# Altium PCB SIGNAL-GENERATOR-NODE-PCB.PcbDoc
Units mm, origin at the board's own origin, x right, y up, seen from the top; angles counter-clockwise.
Board outline 152.4 x 101.6 mm, 2 copper layers (Top Layer, Bottom Layer); 64 components, 36 nets, 222 pads, 21 vias.
Unrouted connection lines stored in the file: 105.
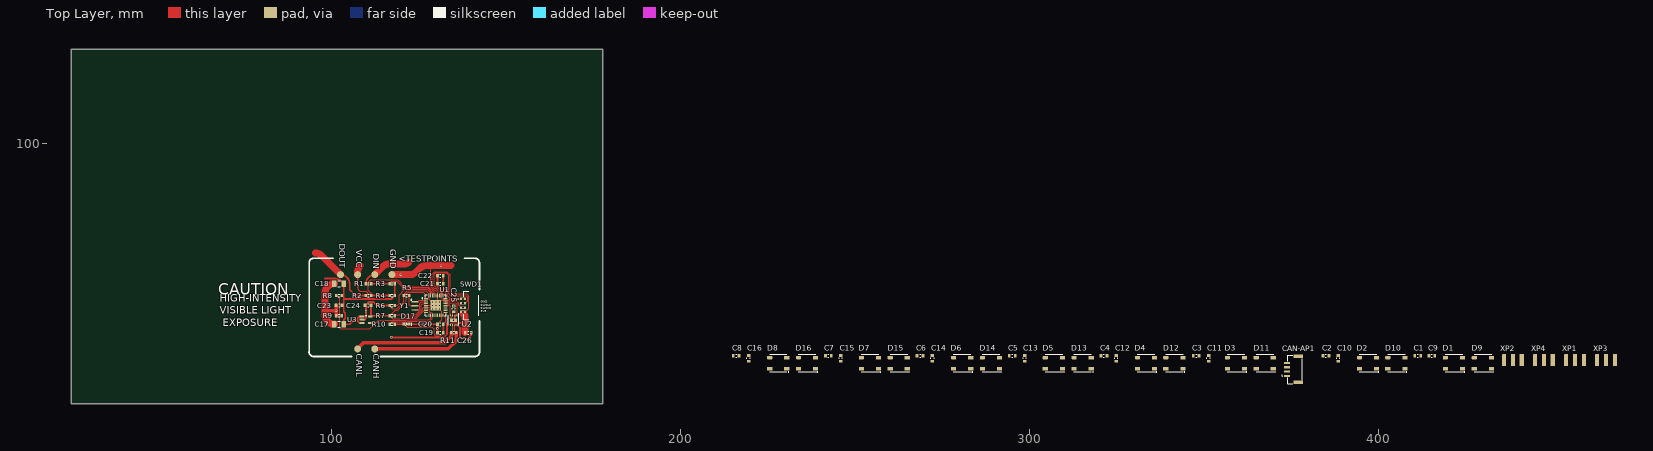
[diagram p0: Top Layer view]
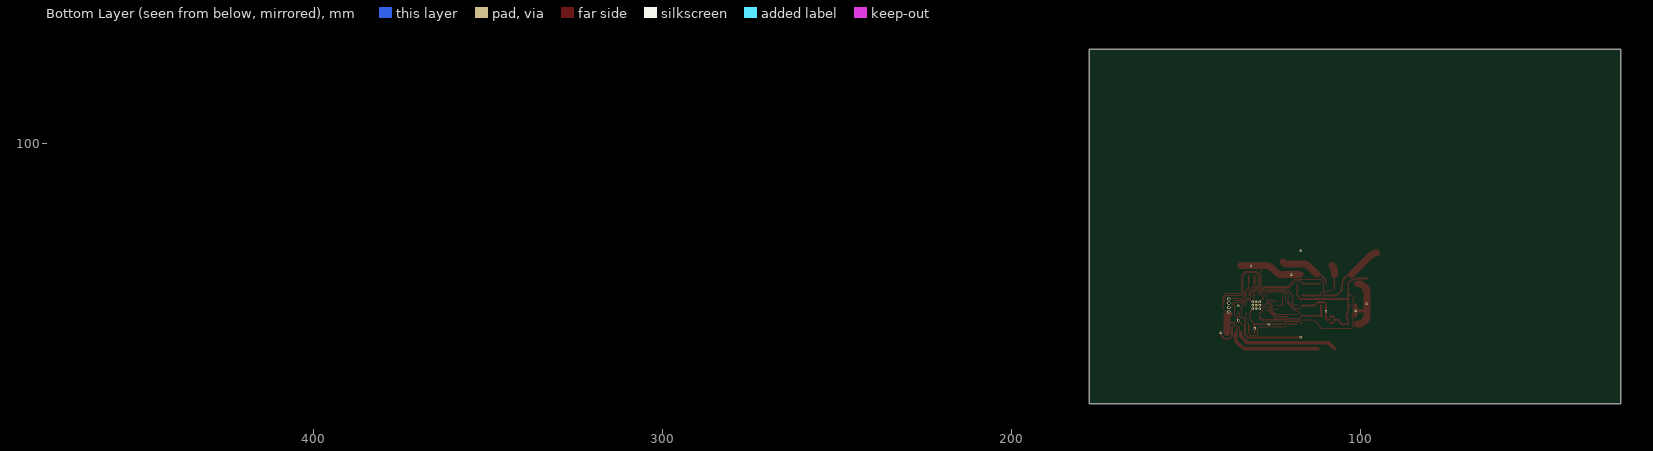
[diagram p1: Bottom Layer view, seen from below]

## Layer stack, top to bottom
Top Solder: solder mask 0.0102, Solder Resist, Dk 3.5
Top Layer: signal copper 0.0356
Dielectric 1: dielectric 0.32, FR-4, Dk 4.8
Bottom Layer: signal copper 0.0356
Bottom Solder: solder mask 0.0102, Solder Resist, Dk 3.5

## Board outline
25.4,25.4 177.8,25.4 177.8,127 25.4,127

## Design rules (kind name [scope] priority, off if disabled: settings)
Clearance [All] p1: gap=0.17 ignorepadtopadclearanceinfootprint=FALSE
PolygonConnect [All] p1: connectstyle=Relief reliefconductorwidth=0.254 reliefentries=4 polygonreliefangle="90 Angle" airgapwidth=0.254
RoutingVias [All] p1: holewidth=0.3 width=0.7 viastyle="Through Hole" minholewidth=0.3 minwidth=0.7 maxholewidth=0.5 maxwidth=1
SolderMaskExpansion [All] p1: expansion=0.102 istentingtop=FALSE
Width [All] p1: maxlimit=5 minlimit=0.17 preferedwidth=0.2
30 further rules are at their usual default settings.

## Components (designator, comment, footprint, x,y, rotation, side; value= is the part's Value field where it differs from the comment)
C1 "GX035C104MAT2-500" *CAPC1608X90 411.353,39.116 r0 top value=0.1u
C2 "GX035C104MAT2-500" *CAPC1608X90 385.064,39.116 r0 top value=0.1u
C3 "GX035C104MAT2-500" *CAPC1608X90 347.853,39.116 r0 top value=0.1u
C4 "GX035C104MAT2-500" *CAPC1608X90 321.437,39.116 r0 top value=0.1u
C5 "GX035C104MAT2-500" *CAPC1608X90 295.148,39.116 r0 top value=0.1u
C6 "GX035C104MAT2-500" *CAPC1608X90 268.732,39.116 r0 top value=0.1u
C7 "GX035C104MAT2-500" *CAPC1608X90 242.443,39.116 r0 top value=0.1u
C8 "GX035C104MAT2-500" *CAPC1608X90 216.027,39.116 r0 top value=0.1u
C9 "GX035C104MAT2-500" *CAPC1608X90 415.417,39.116 r0 top value=0.1u
C10 "GX035C104MAT2-500" *CAPC1608X90 388.62,38.354 r90 top value=0.1u
C11 "GX035C104MAT2-500" *CAPC1608X90 351.409,38.354 r90 top value=0.1u
C12 "GX035C104MAT2-500" *CAPC1608X90 324.993,38.354 r90 top value=0.1u
C13 "GX035C104MAT2-500" *CAPC1608X90 298.704,38.354 r90 top value=0.1u
C14 "GX035C104MAT2-500" *CAPC1608X90 272.288,38.354 r90 top value=0.1u
C15 "GX035C104MAT2-500" *CAPC1608X90 245.999,38.354 r90 top value=0.1u
C16 "GX035C104MAT2-500" *CAPC1608X90 219.583,38.354 r90 top value=0.1u
C17 "GRM31CR61A476KE15L" *CAPC3216X125N 102.218,48.128 r0 top value=47u
C18 "GRM31CR61A476KE15L" *CAPC3216X125N 102.218,59.728 r0 top value=47u
C19 "GX035C104MAT2-500" *CAPC1608X90 131.249,45.728 r180 top value=0.1u
C20 "GX035C104MAT2-500" *CAPC1608X90 131.249,48.128 r180 top value=0.1u
C21 "GX035C104MAT2-500" *CAPC1608X90 131.249,59.728 r0 top value=0.1u
C22 "GX035C104MAT2-500" *CAPC1608X90 131.249,62.028 r0 top value=0.1u
C23 "GX035C104MAT2-500" *CAPC1608X90 102.218,53.518 r180 top value=0.1u
C24 "GX035C104MAT2-500" *CAPC1608X90 110.528,53.518 r180 top value=0.1u
C25 "GX035C104MAT2-500" *CAPC1608X90 135.086,52.538 r90 top value=0.1u
C26 "GX035C104MAT2-500" *CAPC1608X90 139.231,45.728 r0 top value=0.1u
CAN-AP1 "SM04B-GHS-TB(LF)(SN)-" JST_SM04B-GHS-TB(LF)(SN)- 376.174,35.179 r90 top
D1 "WS2812" LED_WS2812 421.767,36.957 r0 top
D2 "WS2812" LED_WS2812 397.129,36.957 r0 top
D3 "WS2812" LED_WS2812 359.283,36.957 r0 top
D4 "WS2812" LED_WS2812 333.502,36.957 r0 top
D5 "WS2812" LED_WS2812 307.086,36.957 r0 top
D6 "WS2812" LED_WS2812 280.797,36.957 r0 top
D7 "WS2812" LED_WS2812 254.381,36.957 r0 top
D8 "WS2812" LED_WS2812 228.092,36.957 r0 top
D9 "WS2812" LED_WS2812 430.022,36.957 r0 top
D10 "WS2812" LED_WS2812 405.257,36.957 r0 top
D11 "WS2812" LED_WS2812 367.538,36.957 r0 top
D12 "WS2812" LED_WS2812 341.63,36.957 r0 top
D13 "WS2812" LED_WS2812 315.341,36.957 r0 top
D14 "WS2812" LED_WS2812 289.052,36.957 r0 top
D15 "WS2812" LED_WS2812 262.636,36.957 r0 top
D16 "WS2812" LED_WS2812 236.347,36.957 r0 top
D17 "0603-LED-BLUE" *LEDM1608X80_LTE-C1906R-14(Primary) 121.549,48.152 r180 top
R1 "Res3" J1-0603 110.678,59.728 r180 top value=330
R2 "Res3" J1-0603 110.678,56.368 r180 top value=330
R3 "Res3" J1-0603 117.449,59.728 r0 top value=10K
R4 "Res3" J1-0603 117.449,56.368 r0 top value=10K
R5 "RC0603FR-0710KL" J1-0603 121.549,56.368 r0 top value=0R
R6 "RC0603FR-0710KL" J1-0603 117.449,53.518 r0 top value=10k
R7 "RC0603FR-0710KL" J1-0603 117.449,50.568 r0 top value=10k
R8 "RC0603FR-0710KL" J1-0603 102.218,56.368 r0 top value=10k
R9 "RC0603FR-0710KL" J1-0603 102.218,50.568 r0 top value=10k
R10 "Res3" J1-0603 117.449,48.128 r0 top value=330
R11 "Res3" J1-0603 135.086,45.728 r0 top value=120
SWD1 "BM04B-GHS-TBT(LF)(SN)(N)" JST_BM04B-GHS-holes 141.149,53.518 r90 top
U1 "STM32F103T8" *QFN50P600X600X100-37N 129.949,53.518 r0 top
U2 "TJA1042" SOT782-1 135.069,49.262 r180 top
U3 "SPX3819M5-L-3-3/TR" *SOT95P280X145-5N 109.949,49.428 r0 top value=3V3
XP1 "Header 3" "HDR Side 3 pin" 456.438,37.846 r0 top
XP2 "Header 3" "HDR Side 3 pin" 438.658,37.846 r0 top
XP3 "Header 3" "HDR Side 3 pin" 465.328,37.846 r0 top
XP4 "Header 3" "HDR Side 3 pin" 447.548,37.846 r0 top
Y1 "CSTCE8M00G55-R0" *OSC_CSTCE8M00G55-R0 123.949,53.405 r270 top

## Footprints (in the part's own frame and the unit in brackets; to place one, negate y for a bottom-side part, rotate by r counter-clockwise, add the part's x,y. Pads: shape width x height; smd on the part's side, far side on the other; paste and mask are expansions set on the pad)
*CAPC1608X90 [mm]
  rect 0.8x1 smd: 1(-0.85,0) 2(0.85,0)
  silkscreen extent -0.15,-0.45 0.15,0.45, body extent -0.8,-0.4 0.8,0.41, height 0.88
*CAPC3216X125N [mm]
  rect 1.38x1.82 smd: 1(-1.369,0) 2(1.369,0)
  silkscreen extent -0.36,-0.9 0.36,0.9, body extent -1.6,-0.87 1.6,0.87, height 1.71
*LEDM1608X80_LTE-C1906R-14(Primary) [mm]
  rect 0.8x0.8 smd: A(0.75,0) C(-0.75,0)
  silkscreen extent -1.45,-0.38 0.16,0.45, body extent -0.8,-0.3 0.8,0.3, height 1.15
*OSC_CSTCE8M00G55-R0 [mm]
  rect 0.4x2 smd: 1(-1.2,0) 2(0,0) 3(1.2,0)
  silkscreen extent -1.83,-1.13 -1.57,-0.87, body extent -1.6,-0.65 1.6,0.65, height 1
*QFN50P600X600X100-37N [mm]
  rect 1.08x0.26 smd: 1(-2.815,2) 2(-2.815,1.5) 3(-2.815,1) 4(-2.815,0.5) 5(-2.815,0) 6(-2.815,-0.5) 7(-2.815,-1) 8(-2.815,-1.5) 9(-2.815,-2) 19(2.815,-2) 20(2.815,-1.5) 21(2.815,-1) 22(2.815,-0.5) 23(2.815,0) 24(2.815,0.5) 25(2.815,1) 26(2.815,1.5) 27(2.815,2)
  rect 0.26x1.08 smd: 10(-2,-2.815) 11(-1.5,-2.815) 12(-1,-2.815) 13(-0.5,-2.815) 14(0,-2.815) 15(0.5,-2.815) 16(1,-2.815) 17(1.5,-2.815) 18(2,-2.815) 28(2,2.815) 29(1.5,2.815) 30(1,2.815) 31(0.5,2.815) 32(0,2.815) 33(-0.5,2.815) 34(-1,2.815) 35(-1.5,2.815) 36(-2,2.815)
  rect 3x3 smd: ""(0,0)
  silkscreen extent -3.97,-3 3,3, body extent -3,-3 3,3, height 1
*SOT95P280X145-5N [mil]
  rect 52x22 smd: 1(-46,37) 2(-46,0) 3(-46,-37) 4(46,-37) 5(46,37)
  silkscreen extent -7,46 7,48, body extent -55,-57 55,57, height 57
"HDR Side 3 pin" [mm]
  rrect50% 1.2x3.5 smd: 1(-2.54,0)
  rect 1.2x3.5 smd: 2(0,0) 3(2.54,0)
  body extent -3.85,-10.67 3.77,1.27, height 1.57
J1-0603 [mm] "Chip Resistor, Body 1.6x0.8mm, IPC High Density"
  rect 0.7x0.9 smd: 1(-0.75,0) 2(0.75,0)
  silkscreen extent -0.2,-0.35 0.2,0.35, body extent -0.85,-0.48 0.85,0.48, height 0.9
JST_BM04B-GHS-holes [mm]
  rect 0.7x1.7 / inner rect 0.6x1.7 / far side round 0.9 hole 0.6: 1(1.875,3.35) 2(0.625,3.35) 3(-0.625,3.35) 4(-1.875,3.35)
  silkscreen extent -4.13,-1.1 4.13,4.9, body extent -4.12,-1.02 4.12,3.93, height 4.15
JST_SM04B-GHS-TB(LF)(SN)- [mm]
  rect 0.6x1.7 smd: 1(-1.875,2.275) 2(-0.625,2.275) 3(0.625,2.275) 4(1.875,2.275)
  rect 1x2.7 smd: SH1(-3.725,-0.925) SH2(3.725,-0.925)
  silkscreen extent -4.13,-2.02 4.13,3.77, body extent -4.06,-2.16 4.19,2.69, height 4.35
LED_WS2812 [mm]
  rrect50% 1.5x1 smd: 1(-2.45,1.6)
  rect 1.5x1 smd: 2(-2.45,-1.6) 3(2.45,-1.6) 4(2.45,1.6)
  silkscreen extent -2.5,-2.64 3.02,2.5, body extent -2.7,-2.45 2.65,2.5, height 1.5
SOT782-1 [mm]
  rect 0.3x0.525 smd: 1(-0.975,-1.362) 2(-0.325,-1.362) 3(0.325,-1.362) 4(0.975,-1.362) 5(0.975,1.362) 6(0.325,1.362) 7(-0.325,1.362) 8(-0.975,1.362)
  rect 2x0.9 smd paste-2: P$9(0,0)
  silkscreen extent -1.5,-1.88 1.5,1.5, body extent -1.52,-1.52 1.52,1.52, height 0.85

## Part data
C1 C2 C3 C4 C5 C6 C7 C8 C9 C10 C11 C12 C13 C14 C15 C16 C19 C20 C21 C22 C23 C24 C25 C26: "Cap Thin Film 0.1uf 50v 0603", Package="0603 AVX", MF=AVX, Pacage Metric=1608, SnapEDA_Link=https://www.snapeda.com/parts/GX035C104MAT2-500/AVX/view-part/?ref=snap, Type=SMD
  C1 C2 C3 C4 C5 C6 C7 C8 C9 C10 C11 C12 C13 C14 C15 C16 C19 C20 C21 C22 C25 C26: MP="GX035C104MAT2-500 or CL10B104JB8NNNC"
  C23 C24: MP=GX035C104MAT2-500
C17 C18: "Multilayer Ceramic Capacitor, GRM Series, 47 - F, - 10%, X5R, 10 V, 1206 [3216 Metric]", Package="1206 Murata Electronics", MF="Murata Electronics", MP=GRM31CR61A476KE15L, SnapEDA_Link=https://www.snapeda.com/parts/GRM31CR61A476KE15L/Murata%20Electronics%20North%20America/view-part/?ref=snap, Type=SMD
CAN-AP1: "Connector Header Surface Mount, Right Angle 4 position 0.049 _1.25mm_", Package=None, ChipDip_Link=https://www.chipdip.ru/product/sm04b-ghs-tb-lf-sn-gh-1.25mm-header-side-ent, HelpURL=http://www.farnell.com/datasheets/2082975.pdf, MF="JST Sales", MP=SM04B-GHS-TB(LF)(SN), SnapEDA_Link=https://www.snapeda.com/parts/SM04B-GHS-TB%28LF%29%28SN%29-/JST%20Sales%20America%20Inc./view-part/2759740/?ref=snap, System=Connector
D1 D2 D3 D4 D5 D6 D7 D8 D9 D10 D11 D12 D13 D14 D15 D16: "Addressable Lighting - 5 LED Discrete Serial _Shift Register_ Red, Green, Blue _RGB_ 5.00mm Dia", Package="SparkFun Electronics", Availability=Unavailable, ChipDip_Link=https://www.chipdip.ru/product/ws2812b, HelpURL=https://static.chipdip.ru/lib/554/DOC001554925.pdf, MF="SparkFun Electronics", MP=WS2812, Price=None, SnapEDA_Link=https://www.snapeda.com/parts/WS2812/SparkFun%20Electronics/view-part/106391/?ref=snap
D17: library part LTE-C1906R-14, "LED IrLED Chip LED 2-Pin SMD T/R", Package="0603 Lite-On", MP=0603-LED-BLUE, SnapEDA_Link=https://www.snapeda.com/parts/LTE-C1906R-14/Lite-On%20Inc./view-part/?ref=snap, Type=SMD
R1 R2 R3 R4 R10: "Resistor", Package=R0603, Pacage Metric=1608, Type=SMD
  R1 R2 R3 R4: ChipDip_Link=https://www.chipdip.ru/product0/9000079736, HelpURL=https://www.chipdip.ru/product0/9000079736, MP="4.7K 1% 0603"
  R10: ChipDip_Link=https://www.chipdip.ru/product0/9000079628, HelpURL=https://www.chipdip.ru/product0/9000079628, MP=RC0603FR-07330RL
R5 R6 R7 R8 R9: "10 kOhms 1 0.1 W 1 10 W Chip Resistor 0603 1608 Metric Thick Film", Package=R0603, ChipDip_Link=https://www.chipdip.ru/product0/9000079736, HelpURL=https://www.chipdip.ru/product0/9000079736, MF="Yageo or NXP", MP="10K 1% 0603", Pacage Metric=1608, SnapEDA_Link=https://www.snapeda.com/parts/RC0603FR-0710KL/Yageo/view-part/?ref=dk&t=RC0603FR-0710KL&con_ref=None, Type=SMD
R11: "120 Ohms 1 0.1 W 1 10 W Chip Resistor 0603 1608 Metric Thick Film", Package=R0603, ChipDip_Link=https://www.chipdip.ru/product0/9000079618, HelpURL=https://www.chipdip.ru/product0/9000079618, MP=RC0603FR-07120RL, Pacage Metric=1608, Type=SMD
SWD1: "Conn Shrouded Header HDR 4 POS 1.25mm Solder ST SMD Reel", Package=None, Instructions="Do not install", MF="JST Sales", MP=SM04B-GHS-TB(LF)(SN), SnapEDA_Link=https://www.snapeda.com/parts/BM04B-GHS-TBT%28LF%29%28SN%29%28N%29/JST%20Sales%20America%20Inc./view-part/?ref=snap, System=Connector, Type=SMD
U1: "STM32F103T8U6, Микроконтроллер 32BIT ARM 64K FLASH [VFQFPN-36]", Package=VFQFPN-36, ChipDip_Link=https://www.chipdip.ru/product/stm32f103t8u6-2, HelpURL=http://www.st.com/stonline/products/literature/ds/13587.pdf, MF=STM, MP=STM32F103T8U6, SnapEDA_Link=https://www.snapeda.com/parts/STM32F103T8U6TR/STMicroelectronics/view-part/?ref=search&t=STM32F103T8U6, Type=SMD
U2: "1/1 Transceiver Half CANbus 8-SO", Package="VDFN-8 NXP USA", ChipDip_Link=https://www.chipdip.ru/product1/8002840332, HelpURL=https://static.chipdip.ru/lib/583/DOC001583059.pdf, MF="NXP USA", MP=TJA1042, SnapEDA_Link=https://www.snapeda.com/parts/TJA1042/NXP%20USA%20Inc./view-part/900919/?ref=snap, Type=SMD
U3: library part SPX3819M5-L, "Low Dropout Voltage Regulator, Adjustable 0.5A, В±1%, 2.5 to 16 Vin, 5-Pin SOT-23", Package="SOT-23-5 Exar", ChipDip_Link=https://www.chipdip.ru/product1/8003455237, HelpURL=http://www.farnell.com/datasheets/2614478.pdf, MF="MaxLinear, Inc.", MP=SPX3819M5-L-3-3/TR, SnapEDA_Link=https://www.snapeda.com/parts/SPX3819M5-L/MaxLinear%2C%20Inc./view-part/?ref=snap, Type=SMD
XP1 XP2 XP3 XP4: "Header, 3-Pin", LatestRevisionDate=17-Jul-2002, LatestRevisionNote="Re-released for DXP Platform.", Publisher="Altium Limited"
Y1: "Ceramic Resonator 8MHz ??0.5% _Tol_ ??0.2% _Stability_ 33pF 40Ohm 3-Pin CSMD T/R", Package="SMD-3 Murata", ChipDip_Link=https://www.chipdip.ru/product1/8001783721, HelpURL=https://www.murata.com/en-eu/api/pdfdownloadapi?cate=&partno=CSTCE8M00G55-R0, MF=Murata, MP=CSTCE8M00G55-R0, SnapEDA_Link=https://www.snapeda.com/parts/CSTCE8M00G55-R0/Murata%20Electronics%20North%20America/view-part/?ref=snap, Type=SMD

## Free pads (board coordinates)
  round 2 smd: 5(112.449,62.328) 6(102.647,62.328) 8(107.548,62.328) 9(117.359,62.328) 10(112.449,41.048) 11(107.548,41.048)

## Via types
v1: diameter 0.7, hole 0.3, Top Layer to Bottom Layer, tented top, 21 vias

## Nets (pads, with @x,y where several pads share a name; then routed paths per layer and width w, separated by ;. In a path a pad name is that pad's centre, name@x,y a point inside that pad or via, vN(x,y) a via of type N, cw(c..) or ccw(c..) an arc to the next point about the centre after c; other vN are vias at no path point)
3.3: C19.1 C20.1 C21.1 C22.1 C24.1 C26.1 R7.1 SWD1.4 U1.1 U1.6 U1.12 U1.19 U1.27 U1.29 U2.5 U3.5 | length 119.2
  Top Layer w0.2: U1.1 127.134,56.543 126.349,57.328 121.982,57.328 121.544,56.89 121.544,54.644 119.028,52.128 118.259,52.128 R7.1 117.572,49.695 120.716,49.695 121.349,50.328 124.266,50.328 126.149,52.211 126.149,52.692 126.475,53.018 U1.6 127.867,53.018 128.064,52.821 128.064,51.813 128.249,51.628 128.697,51.628 128.953,51.372 U1.12@128.953,51.154 ; U1.12 128.949,49.628 128.249,48.928 121.849,48.928 121.499,48.578 121.499,47.578 121.749,47.328 128.949,47.328 129.461,46.816 129.461,45.206 129.819,44.848 131.315,44.848 132.099,45.631 C19.1 ; C21.1 130.399,59.478 132.764,57.113 U1.27 132.754,55.528 132.719,55.493 131.608,55.493 131.449,55.652 U1.29 131.449,56.962 130.049,58.362 130.016,58.395 129.548,58.395 128.967,58.975 128.967,62.512 129.683,63.228 133.149,63.228 134.049,62.328 134.049,57.328 134.549,56.828 138.749,56.828 139.449,56.128 139.449,52.628 138.464,51.643 SWD1.4 SWD1.4@137.674,51.518 ; C20.1 132.764,48.793 U1.19 ; U2.5 134.094,48.144 134.462,48.512 136.569,48.512
  Top Layer w0.5: U3.5 U3.5@111.318,50.568 ; C24.1 111.378,50.628 U3.5@111.318,50.568 ; R7.1 U3.5@111.318,50.568 ; C21.1 C22.1 ; C19.1 C20.1 ; 136.569,48.512 136.575,48.507 138.381,48.507
  Top Layer w2: 137.799,51.118 138.381,50.536 138.381,48.507 C26.1
ADC_5V: R8.1 R9.2 U1.8 | length 37.4
  Top Layer w0.2: R8.1 102.19,55.646 ; 102.191,55.645 cw(c102.048,55.505) 102.248,55.506 102.249,50.958 102.249,50.741 cw(c101.468,50.568) 102.249,50.395 102.249,50.147 102.25,47.311 ccw(c102.45,47.31) 102.308,47.169 102.649,46.828 111.049,46.828 113.516,49.295 121.016,49.295 121.502,49.781 124.284,49.781 126.492,51.988 127.104,51.988 U1.8 ; 102.268,50.547 cw(c102.358,50.368) 102.358,50.568 R9.2
BOOT0: R6.2 U1.35 | length 14.8
  Top Layer w0.2: R6.2 118.939,53.518 119.449,54.028 119.449,56.462 121.115,58.128 127.449,58.128 128.449,57.128 U1.35
CAN_H: CAN-AP1.2 pad.10 R11.2 U2.7 | length 29.3
  Top Layer w0.3: U2.7 135.394,46.17 R11.2
  Top Layer w1: pad.10@112.269,41.048 133.549,41.048 135.836,43.335 R11.2
CAN_L: CAN-AP1.3 pad.11 R11.1 U2.6 | length 31.7
  Top Layer w0.3: R11.1 134.744,46.136 U2.6
  Top Layer w1: pad.11@107.489,41.108 109.142,42.761 132.452,42.761 134.336,44.645 R11.1
CAN_RXD: U1.23 U2.4 | length 4.1
  Top Layer w0.2: U1.23 133.828,53.518 134.094,53.252 U2.4
CAN_TXD: U1.24 U2.1 | length 6.9
  Top Layer w0.2: U1.24 132.77,54.024 133.886,54.024 134.162,54.3 135.702,54.3 136.044,53.959 U2.1
DIN: D1.4 pad.5 R1.2 XP1.1 XP2.1 XP3.3 XP4.3 | length 15.1
  Top Layer w0.5: R1.2 cw(c112.617,59.728) 110.716,61.63 cw(c112.401,59.944) 112.401,62.328 pad.5
  Top Layer w2: pad.5 114.805,64.684 cw(c116.601,62.888) 116.601,65.428 121.042,65.428 ccw(c121.042,67.135) 122.249,65.928
DOUT: D16.2 pad.6 R2.2 | length 20.7
  Top Layer w0.5: pad.6 cw(c102.647,59.789) 104.442,61.584 cw(c102.494,59.636) 105.249,59.636 105.249,58.311 ccw(c105.932,58.311) 105.449,57.828 106.349,56.928 ccw(c107.701,58.28) 107.701,56.368 R2.2
  Top Layer w2: 95.395,68.528 cw(c95.395,65.988) 97.191,67.784 pad.6
GND: C1.2 C2.2 C3.2 C4.2 C5.2 C6.2 C7.2 C8.2 C9.2 C10.2 C11.2 C12.2 C13.2 C14.2 C15.2 C16.2 C17.1 C18.1 C19.2 C20.2 C21.2 C22.2 C23.2 C24.2 C25.2 C26.2 CAN-AP1.4 CAN-AP1.SH1 CAN-AP1.SH2 D1.3 D2.3 D3.3 D4.3 D5.3 D6.3 D7.3 D8.3 D9.3 D10.3 D11.3 D12.3 D13.3 D14.3 D15.3 D16.3 D17.C pad.9 R5.1 R6.1 R9.1 SWD1.1 U1. U1.5 U1.17 U1.18 U1.26 U1.30 U1.31 U1.32 U1.36 U2.2 U2.8 U2.P$9 U3.2 XP1.3 XP2.3 XP3.1 XP4.1 | length 129.9
  Top Layer w0.2: R6.1 116.699,53.278 117.449,52.528 118.749,52.528 120.799,54.578 R5.1 ; R5.1@120.678,56.589 121.817,57.728 127.049,57.728 U1.36@127.977,56.8 ; U1.5 v1(129.949,53.518) ; U1.36@127.974,56.333 127.974,55.493 v1(129.949,53.518) ; 128.513,64.928 128.513,58.864 129.549,57.828 129.849,57.828 130.449,57.228 U1.31 ; U1.32 U1.31 ; C20.2 131.699,49.428 131.699,50.703 ; U1.30 U1.31 ; U1.17 131.699,50.703 ; U1.18 131.699,50.703 ; C21.2 132.099,58.731 133.249,57.581 133.249,56.241 134.094,55.396 ; 133.997,55.396 137.796,55.396 SWD1.1 ; 134.095,55.396 133.717,55.018 U1.26 131.449,55.018 v1(130.949,54.518) U1.@130.449,54.018 ; v1(135.069,49.262) U2.P$9@135.394,49.587 ; v1(129.949,53.518) U1.@130.449,54.018 ; v1(129.949,53.518) 131.699,51.768 131.699,50.703 ; U1.@130.449,54.018 U1.31
  Top Layer w0.381: C21.2 C22.2
  Top Layer w0.5: U3.2 109.564,49.428 109.949,49.813 v1(109.949,51.801) 109.949,53.789 110.681,54.521 112.056,54.521 113.059,53.518 R6.1 ; D17.C 130.375,48.152 C20.2 v1(130.399,46.928) C19.2 ; U2.P$9@135.394,49.587 U2.2 ; U2.8 136.879,47.065 136.879,44.598 137.519,43.958 139.119,43.958 140.081,44.92 v1(140.081,45.728)
  Top Layer w1: 98.229,52.008 101.335,52.008 ccw(c101.335,52.041) v1(101.368,52.041) ; C23.2 v1(101.368,52.041) ; R9.1@101.371,50.565 101.368,50.565 v1(101.368,52.041)
  Top Layer w2: C17.1 100.769,48.128 cw(c100.769,50.668) 98.229,50.668 98.229,52.008 98.229,57.188 cw(c100.769,57.188) 100.769,59.728 C18.1 ; pad.9 v1(119.928,62.328) 122.497,62.328 ccw(c122.497,64.868) 124.293,63.072 125.405,64.184 cw(c127.201,62.388) 127.201,64.928 128.513,64.928 134.369,64.928
  other v1: 126.337,48.152 128.949,52.528 129.949,52.528 130.949,52.528 135.086,53.388 128.949,53.528 130.949,53.528 98.229,53.989 128.962,54.505 129.949,54.528 131.441,64.928
LED1: R10.1 U1.11 | length 13.4
  Top Layer w0.2: R10.1 116.699,48.228 117.343,48.872 117.719,48.872 117.725,48.878 118.673,48.878 121.165,48.878 121.635,49.349 127.951,49.349 128.449,49.847 U1.11
NetD1_2: D1.2 D2.4
NetD2_2: D2.2 D3.4
NetD3_2: D3.2 D4.4
NetD4_2: D4.2 D5.4
NetD5_2: D5.2 D6.4
NetD6_2: D6.2 D7.4
NetD7_2: D7.2 D8.4
NetD8_2: D8.2 D9.4
NetD9_2: D9.2 D10.4
NetD10_2: D10.2 D11.4
NetD11_2: D11.2 D12.4
NetD12_2: D12.2 D13.4
NetD13_2: D13.2 D14.4
NetD14_2: D14.2 D15.4
NetD15_2: D15.2 D16.4
NetD17_A: D17.A R10.2 | length 2.6
  Top Layer w0.5: R10.2 120.775,48.128 D17.A
NetR5_2: R5.2 Y1.2 | length 4.4
  Top Layer w0.2: R5.2 122.299,53.778 122.649,53.428 123.926,53.428 Y1.2
NetU1_2: U1.2 Y1.1 | length 3.4
  Top Layer w0.2: Y1.1 124.826,54.605 125.249,55.028 127.124,55.028 U1.2
NetU1_3: U1.3 Y1.3 | length 5
  Top Layer w0.2: Y1.3 124.926,52.205 125.349,52.628 125.349,54.128 125.739,54.518 U1.3
NRST: R7.2 U1.4 | length 11.2
  Top Layer w0.2: R7.2 118.459,50.828 124.197,50.828 125.749,52.38 125.749,53.728 126.039,54.018 U1.4
SCL/A2: R2.1 R4.1 U1.33 | length 30.6
  Top Layer w0.2: R2.1 111.428,56.949 110.649,57.728 110.649,60.228 111.299,60.878 118.999,60.878 120.949,58.928 127.78,58.928 129.45,57.258 U1.33@129.45,56.705
  Top Layer w0.5: R2.1 R4.1
SDA/A1: R1.1 R3.1 U1.34 | length 19.7
  Top Layer w0.2: R3.1 116.699,59.807 117.37,60.478 118.728,60.478 120.678,58.528 127.615,58.528 128.957,57.186 U1.34@128.957,56.691
  Top Layer w0.5: R1.1 R3.1
SWDIO: SWD1.3 U1.25 | length 6.2
  Top Layer w0.2: U1.25 133.814,54.518 134.126,54.83 135.74,54.83 136.463,54.107 136.463,53.696 137.266,52.893 SWD1.3
SWLK: SWD1.2 U1.28 | length 25.7
  Top Layer w0.2: U1.28 131.949,57.028 130.149,58.828 129.749,58.828 129.449,59.128 129.449,62.428 129.849,62.828 132.983,62.828 133.649,62.162 133.649,56.828 134.149,56.328 138.649,56.328 139.049,55.928 139.049,54.828 138.364,54.143 SWD1.2
VCC: C1.1 C2.1 C3.1 C4.1 C5.1 C6.1 C7.1 C8.1 C9.1 C10.1 C11.1 C12.1 C13.1 C14.1 C15.1 C16.1 C17.2 C18.2 C23.1 C25.1 CAN-AP1.1 D1.1 D2.1 D3.1 D4.1 D5.1 D6.1 D7.1 D8.1 D9.1 D10.1 D11.1 D12.1 D13.1 D14.1 D15.1 D16.1 pad.8 R3.2 R4.2 R8.2 U2.3 U3.1 U3.3 XP1.2 XP2.2 XP3.2 XP4.2 | length 82.2
  Top Layer w0.2: 107.549,58.552 ccw(c108.573,58.552) 108.573,57.528 110.049,57.528 110.649,56.928 110.649,55.328 ; 133.174,48.173 133.174,49.617 133.569,50.012 134.394,50.012 134.744,50.362 U2.3
  Top Layer w0.3: U2.3 134.744,51.346 C25.1
  Top Layer w0.5: 98.171,61.214 98.181,61.224 100.875,61.224 cw(c100.875,58.015) 103.143,60.284 103.561,59.952 C18.2 103.587,56.428 ; R8.2 103.527,56.368 103.587,56.428 ; C23.1 103.477,53.518 103.587,53.628 ; pad.8 107.549,62.327 107.549,58.552 ; U3.3 107.989,48.488 107.549,48.928 107.549,49.428 ; U3.1 107.989,50.368 107.549,49.928 107.549,49.428 ; v1(117.169,44.388) 117.259,44.298 132.225,44.298 133.17,45.243 133.17,48.168 133.174,48.173 ; R3.2 R4.2 117.159,55.328 110.649,55.328 103.587,55.328 ; 103.587,53.628 103.587,55.328 ; 103.587,53.628 103.587,51.718 103.608,51.718 104.018,51.308 104.018,49.828 103.608,49.418 103.587,49.418 C17.2 105.249,48.128 106.549,49.428 107.549,49.428 ; 103.587,55.328 103.587,56.428
  Top Layer w2: pad.8 107.548,63.175 cw(c110.088,63.175) 108.292,64.971
pads on no net: U1.7 U1.9 U1.10 U1.13 U1.14 U1.15 U1.16 U1.20 U1.21 U1.22 U3.4
copper on no net:
  other v1: 117.149,69.128

## Other copper
Top Layer:
  region net 3.3: 132.164,55.493 132.164,55.495 132.307,55.638 132.304,55.642 cw(c132.1,55.768) 132.1,55.589 132.069,55.589 132.069,55.588
  region net GND: 127.974,55.913 ccw(c128.197,55.69) 127.882,55.69 127.882,55.681 ccw(c127.728,55.681) 127.837,55.789 127.823,55.803 127.904,55.884 cw(c127.974,55.814)

## Silkscreen, mask and mechanical layers (free items; w line width, h text height)
Top Overlay:
  lines w0.5: 93.619,40.168 ccw(c94.889,40.168) 94.889,38.898 105.809,38.898 ; 93.649,40.068 93.649,65.758 cw(c94.919,65.758) 94.919,67.028 100.489,67.028 ; 93.649,46.077 93.649,47.728 ; 114.119,38.898 141.199,38.898 ccw(c141.199,40.168) 142.469,40.168 142.469,41.798 142.469,49.138 ; 138.109,67.008 141.199,67.008 cw(c141.199,65.738) 142.469,65.738 142.469,57.993
  text "DOUT" at 101.647,71.204 h3 r270
  text "GND" at 116.362,69.554 h3 r270
  text "VCC" at 106.551,69.528 h3 r270
  text "DIN" at 111.454,68.316 h3 r270
  text "<TESTPOINTS" at 119.265,65.528 h3
  text "CAUTION" at 67.622,55.473 h5.5
  text "GND / SWCLK / SWDIO / 3V3" at 142.849,51.528 h0.6
  text "HIGH-INTENSITY  / VISIBLE LIGHT /  EXPOSURE" at 68.03,46.896 h3.5
  text "CANL" at 106.553,39.733 h3 r270
  text "CANH" at 111.454,39.733 h3 r270